# Altium PCB FxxZx.PcbDoc (part 2 of 2)
Units mil, origin at the board's own origin, x right, y up, seen from the top; angles counter-clockwise.
Board outline 1968 x 1968 mil, 4 copper layers (Top Layer, Gnd Layer, Vcc Layer, Bottom Layer), stack 30.635 mil thick; 55 components, 130 nets, 443 pads, 464 vias.
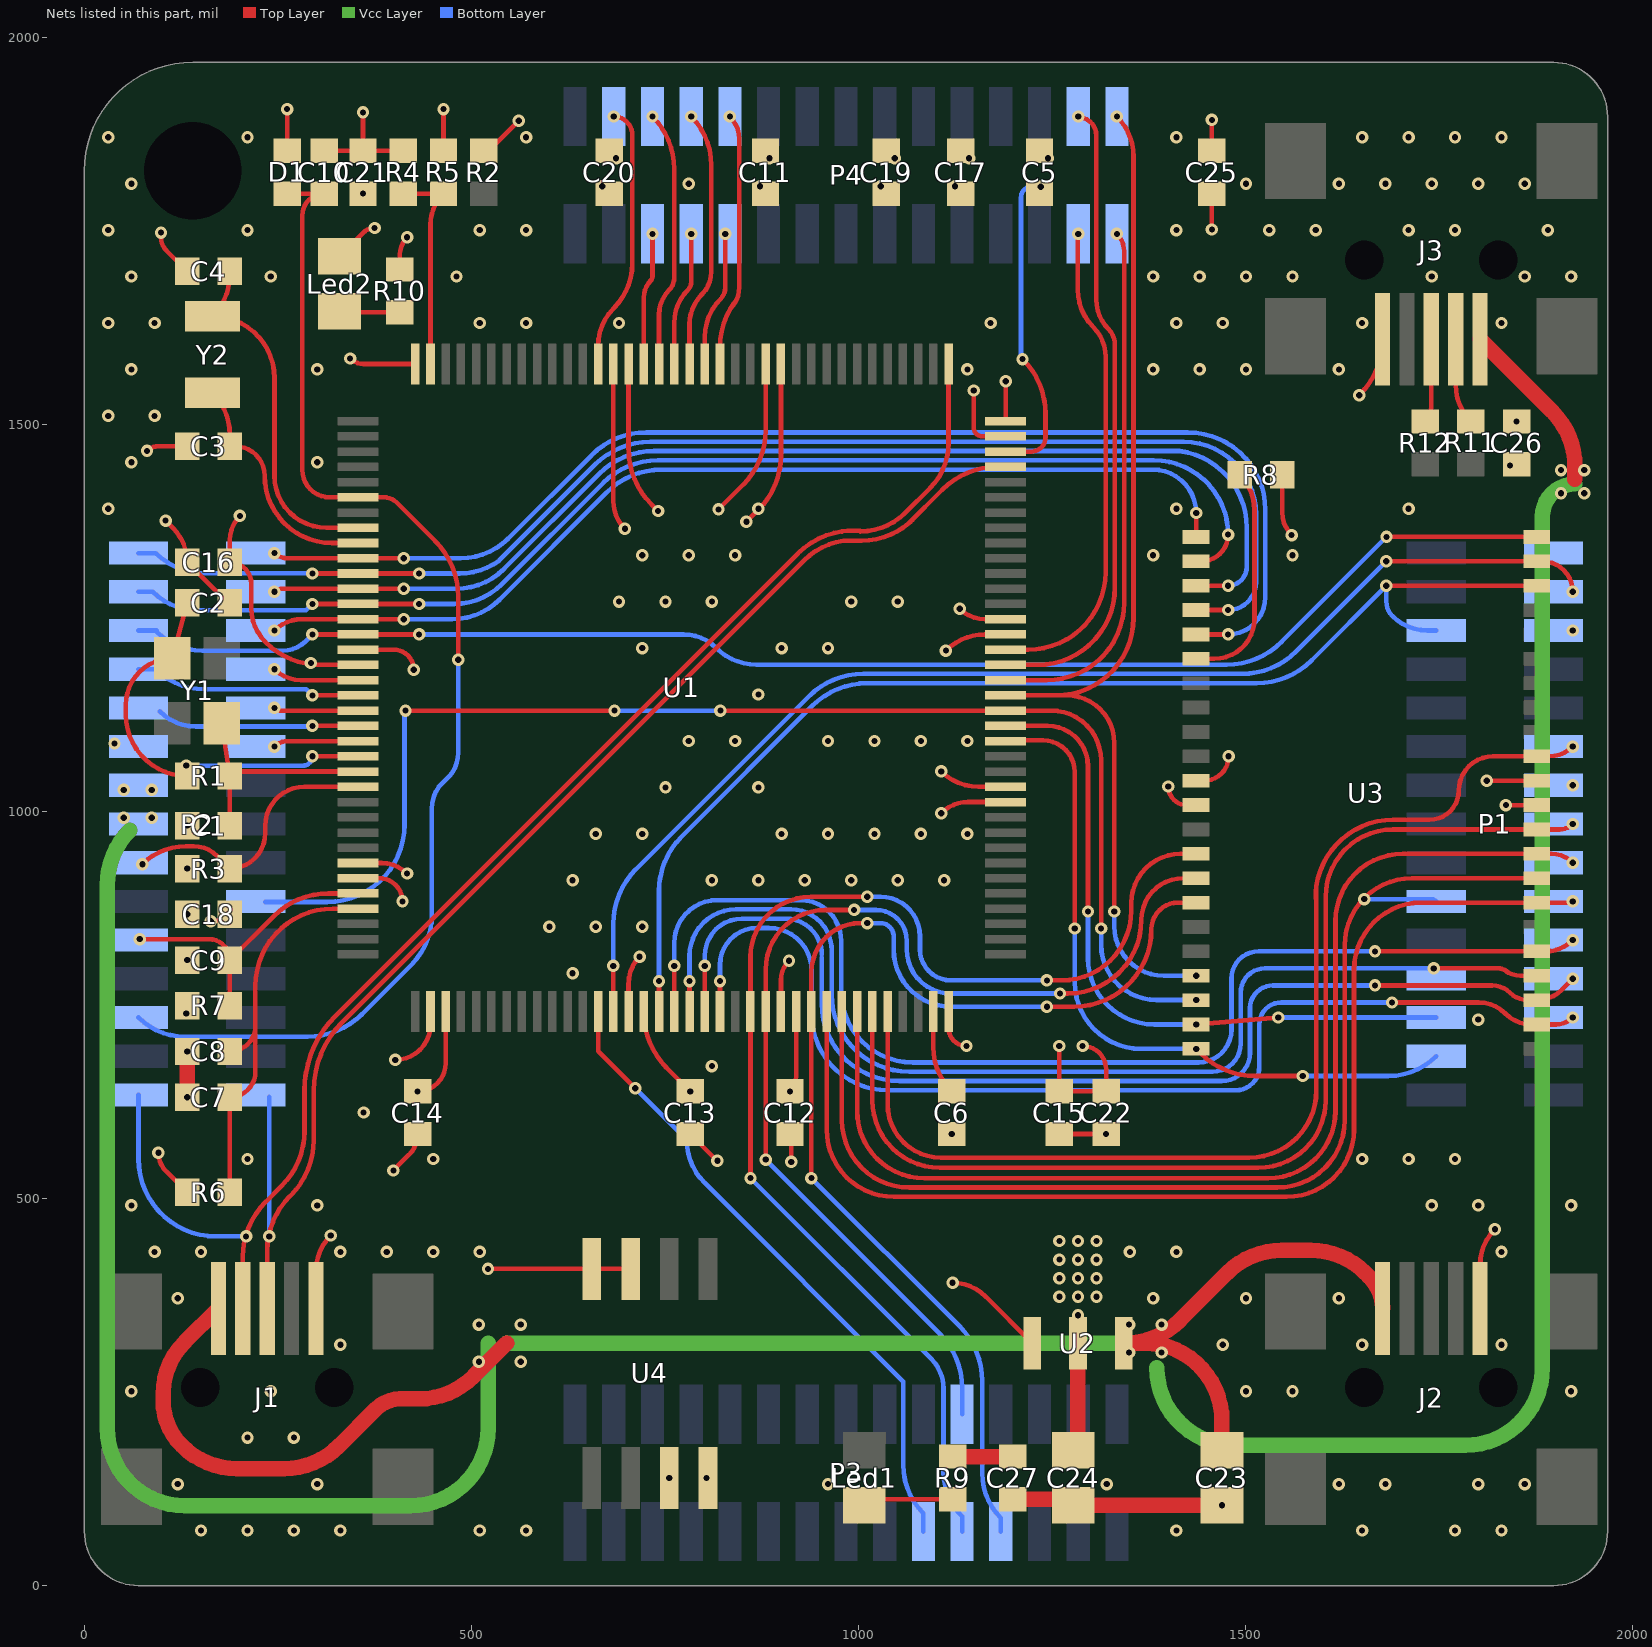
[diagram p4: the nets of this part, all layers, seen from the top]

## Via types
v1: diameter 16, hole 8, Top Layer to Bottom Layer, 464 vias

## Nets (pads, with @x,y where several pads share a name; then routed paths per layer and width w, separated by ;. In a path a pad name is that pad's centre, name@x,y a point inside that pad or via, vN(x,y) a via of type N, cw(c..) or ccw(c..) an arc to the next point about the centre after c; other vN are vias at no path point) (continued)
E8: P3.5 U1.59 U3.14 | length 1640.4
  Top Layer w6: v1(860.58,526.49) U1.59@860.58,741.69 860.58,811.97 cw(c938.58,811.97) 938.58,889.97 v1(1011.52,889.97) ; v1(1243.52,781.97) 1262.58,781.97 ccw(c1262.58,871.97) 1352.58,871.97 1352.58,881.97 cw(c1416.04,881.97) 1416.04,945.43 U3.14@1436.37,945.43 U3.14@1433.37,942.43
  Bottom Layer w6: v1(860.58,526.49) 1094.05,293.02 cw(c1055.44,254.42) 1110.04,254.42 1110.04,147.26 ccw(c1191.85,147.26) 1134,89.42 P3.5@1134,70 ; v1(1011.52,889.97) 1028.52,889.97 cw(c1028.52,838.97) 1079.52,838.97 1079.52,821.97 ccw(c1119.52,821.97) 1119.52,781.97 v1(1243.52,781.97)
E9: P3.26 U1.60 U3.15 | length 1426.6
  Top Layer w6: v1(880.27,550.49) U1.60@880.27,741.69 880.27,795.69 cw(c957.55,795.69) 957.55,872.97 v1(994.52,872.97) ; v1(1260.52,764.97) 1270.57,764.97 ccw(c1270.57,859.97) 1365.57,859.97 cw(c1419.54,859.97) 1405.11,911.97 cw(c1419.54,859.97) 1419.54,913.94 U3.15@1436.37,913.94
  Bottom Layer w6: v1(880.27,550.49) 1104.71,326.05 cw(c1034,255.33) 1134,255.33 P3.26@1134,221.57 ; v1(994.52,872.97) 1022.74,872.97 cw(c1022.74,833.2) 1062.52,833.2 1062.52,821.97 ccw(c1119.52,821.97) 1119.52,764.97 v1(1260.52,764.97)
E10: P3.4 U1.63 U3.16 | length 1495.1
  Top Layer w6: v1(939.32,526.49) U1.63@939.32,741.69 939.32,792.71 cw(c1002.58,792.71) 1002.58,855.97 v1(1011.52,855.97) ; v1(1243.52,747.97) 1278.56,747.97 ccw(c1278.56,847.97) 1378.56,847.97 cw(c1413.03,847.97) 1413.03,882.44 U3.16@1436.37,882.44
  Bottom Layer w6: v1(939.32,526.49) 1130.75,335.06 cw(c1060.04,264.35) 1160.04,264.35 1160.04,145.26 ccw(c1241.85,145.26) 1184,87.42 P3.4@1184,70 ; v1(1011.52,855.97) 1028.52,855.97 cw(c1028.52,838.97) 1045.52,838.97 1045.52,821.97 ccw(c1119.52,821.97) 1119.52,747.97 v1(1243.52,747.97)
E11: P1.10 U1.64 U3.29 | length 1471.8
  Top Layer w6: U1.64@959.01,741.69 959.01,589.36 ccw(c1046.01,589.36) 1046.01,502.36 1553.31,502.36 ccw(c1553.31,589.36) 1640.31,589.36 1640.31,795.44 cw(c1727.31,795.44) 1727.31,882.44 U3.29@1876.37,882.44 1919.24,882.44 ccw(c1919.24,887.76) v1(1923,884)
E12: P1.21 U1.65 U3.30 | length 1506.1
  Top Layer w6: U1.65@978.69,741.69 978.69,601.36 ccw(c1065.69,601.36) 1065.69,514.36 1541.31,514.36 ccw(c1541.31,601.36) 1628.31,601.36 1628.31,826.94 cw(c1715.31,826.94) 1715.31,913.94 U3.30@1876.37,913.94
  Bottom Layer w6: v1(1653.65,886.91) 1739.39,886.91 cw(c1739.39,876.97) P1.21@1746.43,884
E13: P1.9 U1.66 U3.31 | length 1450.1
  Top Layer w6: U1.66@998.38,741.69 998.38,613.36 ccw(c1085.38,613.36) 1085.38,526.36 1529.31,526.36 ccw(c1529.31,613.36) 1616.31,613.36 1616.31,858.43 cw(c1703.31,858.43) 1703.31,945.43 U3.31@1876.37,945.43 1895.4,945.43 cw(c1895.4,906.4) v1(1923,934)
E14: P1.8 U1.67 U3.32 | length 1433.6
  Top Layer w6: U1.67@1018.06,741.69 1018.06,626.92 ccw(c1105.06,626.92) 1105.06,539.92 1516.69,539.92 ccw(c1516.69,626.92) 1603.69,626.92 1603.69,889.93 cw(c1690.69,889.93) 1690.69,976.93 U3.32@1876.37,976.93 1905.93,976.93 ccw(c1905.93,1001.07) v1(1923,984)
E15: P1.6 U1.68 U3.35 | length 1467.8
  Top Layer w6: U1.68@1037.75,741.69 1037.75,621.95 ccw(c1106.79,621.95) 1106.79,552.91 1504.69,552.91 ccw(c1504.69,639.91) 1591.69,639.91 1591.69,903.48 ; 1590.7,887.45 1590.7,889.45 cw(c1690.7,889.45) 1591.69,903.48 ; v1(1923,1084) cw(c1892.62,1114.38) 1892.62,1071.42 U3.35@1876.37,1071.42 1819.86,1071.42 ccw(c1819.86,1027.25) 1775.69,1027.25 cw(c1737.89,1027.25) 1737.89,989.45 1690.7,989.45 ccw(c1690.7,889.45) 1591.69,903.48
F0: P2.1 U1.10 U3.5 | length 1627.9
  Top Layer w6: v1(245.6,1334) ccw(c261.72,1350.12) 261.72,1327.32 U1.10@353.69,1327.32 v1(412.75,1327.32) ; U3.5@1436.37,1228.9 v1(1477.69,1228.9)
  Bottom Layer w6: v1(412.75,1327.32) 485.99,1327.32 ccw(c485.99,1414.32) 547.51,1352.8 655.26,1460.55 cw(c725.97,1389.84) 725.97,1489.84 1425.69,1489.84 cw(c1425.69,1389.84) 1525.69,1389.84 1525.69,1276.9 cw(c1477.69,1276.9) v1(1477.69,1228.9)
F1: P2.30 U1.11 U3.4 | length 1752.7
  Top Layer w6: v1(294.64,1307.64) U1.11@353.69,1307.64 v1(432.43,1307.64) ; U3.4@1436.37,1260.39 v1(1477.69,1260.39)
  Bottom Layer w6: P2.30@70.03,1334 92.31,1334 ccw(c155.17,1396.86) 155.17,1307.96 294.31,1307.96 v1(294.64,1307.64) ; v1(432.43,1307.64) 484.68,1307.64 ccw(c484.68,1394.64) 536.25,1324.57 660.23,1448.55 cw(c730.94,1377.84) 730.94,1477.84 1420,1477.84 cw(c1420,1384.15) 1513.69,1384.15 1513.69,1296.39 cw(c1477.69,1296.39) v1(1477.69,1260.39)
F2: P2.2 U1.12 U3.3 | length 1509.1
  Top Layer w6: v1(245.6,1284) cw(c255.14,1274.46) 255.14,1287.95 U1.12@353.69,1287.95 v1(412.75,1287.95) ; U3.3@1436.37,1291.89 v1(1477.69,1291.89)
  Bottom Layer w6: v1(412.75,1287.95) 480.57,1287.95 ccw(c480.57,1374.95) 542.08,1313.43 665.2,1436.55 cw(c735.91,1365.84) 735.91,1465.84 1414.69,1465.84 ; 1415.31,1465.84 cw(c1401.69,1366.77) 1501.69,1366.77 1501.69,1315.89 cw(c1477.69,1315.89) v1(1477.69,1291.89)
F3: P2.29 U1.13 U3.2 | length 1602.1
  Top Layer w6: v1(294.64,1268.27) U1.13@353.69,1268.27 v1(432.43,1268.27) ; U3.2@1436.37,1323.39 1443.24,1323.39 ccw(c1443.24,1357.84) v1(1477.69,1357.84)
  Bottom Layer w6: P2.29@70.03,1284 88.31,1284 ccw(c146.15,1341.85) 146.15,1260.04 286.41,1260.04 v1(294.64,1268.27) ; v1(432.43,1268.27) 477.85,1268.27 ccw(c477.85,1355.27) 539.37,1293.75 670.17,1424.55 cw(c740.88,1353.84) 740.88,1453.84 1381.69,1453.84 cw(c1381.69,1357.84) v1(1477.69,1357.84)
F4: P2.3 U1.14 U3.1 | length 1329.6
  Top Layer w6: v1(245.6,1234) cw(c280.81,1198.79) 280.81,1248.58 U1.14@353.69,1248.58 v1(412.75,1248.58) ; U3.1@1436.37,1354.88 v1(1436.37,1385.84)
  Bottom Layer w6: v1(412.75,1248.58) 475.14,1248.58 ccw(c475.14,1335.58) 536.65,1274.06 675.14,1412.55 cw(c745.85,1341.84) 745.85,1441.84 1380.37,1441.84 cw(c1380.37,1385.84) v1(1436.37,1385.84)
F5: P2.28 U1.15 U3.44 | length 1894.2
  Top Layer w6: v1(294.64,1228.9) U1.15@353.69,1228.9 v1(432.43,1228.9) ; v1(1682.31,1354.88) U3.44@1876.37,1354.88
  Bottom Layer w6: P2.28@70.03,1234 P2.28@93.31,1234 ; P2.28@93.31,1232.42 ccw(c152.35,1291.46) 152.35,1207.96 256.31,1207.96 ccw(c256.31,1249.95) 285.99,1220.25 v1(294.64,1228.9) ; v1(432.43,1228.9) 774.11,1228.9 cw(c774.11,1169.22) 816.31,1211.42 ccw(c868.24,1263.35) 868.24,1189.91 1475.91,1189.91 ccw(c1475.91,1289.91) 1546.62,1219.19 v1(1682.31,1354.88)
F6: P2.4 U1.18 | length 111.9
  Top Layer w6: v1(245.6,1184) ccw(c279.78,1218.18) 279.78,1169.84 U1.18@353.69,1169.84
F7: P2.27 U1.19 | length 293.9
  Top Layer w6: v1(294.64,1150.16) U1.19@353.69,1150.16
  Bottom Layer w6: P2.27@70.03,1184 92.31,1184 ccw(c155.17,1246.86) 155.17,1157.96 286.83,1157.96 v1(294.64,1150.16)
F8: P2.5 U1.20 | length 109
  Top Layer w6: v1(245.6,1134) ccw(c254.12,1142.52) 254.12,1130.47 U1.20@353.69,1130.47
F9: P2.26 U1.21 | length 261.9
  Top Layer w6: v1(294.64,1110.79) U1.21@353.69,1110.79
  Bottom Layer w6: P2.26@97.31,1129.42 ccw(c144.09,1176.2) 144.09,1110.04 293.89,1110.04 v1(294.64,1110.79)
F10: P2.6 U1.22 | length 110
  Top Layer w6: v1(245.6,1084) cw(c262.75,1066.85) 262.75,1091.1 U1.22@353.69,1091.1
F11: P3.6 U1.49 | length 838.6
  Top Layer w6: U1.49@663.73,741.69 663.73,690.69 v1(711.82,642.61)
  Bottom Layer w6: v1(711.82,642.61) 778.48,575.94 778.48,575.45 ccw(c856.41,575.45) 801.31,520.34 1057.96,263.69 1057.96,156.28 ccw(c1146.86,156.28) 1084,93.42 P3.6@1084,70
F12: P1.2 U1.50 U3.43 | length 1580.8
  Top Layer w6: U1.50@683.42,741.69 v1(683.42,800.75) ; v1(1682.05,1323.39) U3.43@1876.37,1323.39 1883.61,1323.39 cw(c1883.61,1284) v1(1923,1284)
  Bottom Layer w6: v1(683.42,800.75) 683.42,855.04 cw(c783.42,855.04) 712.71,925.75 935.57,1148.62 cw(c1006.29,1077.91) 1006.29,1177.91 1495.15,1177.91 ccw(c1495.15,1277.91) 1565.86,1207.19 v1(1682.05,1323.39)
F13: P1.28 U1.53 U3.42 | length 1567
  Top Layer w6: U1.53@742.47,741.69 v1(742.47,781.06) ; v1(1682.05,1291.89) U3.42@1876.37,1291.89
  Bottom Layer w6: v1(742.47,781.06) 742.47,897.12 cw(c842.47,897.12) 771.76,967.83 940.55,1136.62 cw(c1011.26,1065.91) 1011.26,1165.91 1514.64,1165.91 ccw(c1514.64,1265.91) 1585.35,1195.19 v1(1682.05,1291.89) 1682.05,1271.26 ccw(c1707.99,1271.26) 1689.65,1252.91 ccw(c1735.31,1298.57) 1735.31,1234 P1.28@1746.43,1234
F14: P1.11 U1.54 U3.27 | length 1542.6
  Top Layer w6: U1.54@762.16,741.69 v1(762.16,800.75) ; v1(1667.37,819.45) U3.27@1876.37,819.45 1887.87,819.45 ccw(c1887.87,869.13) v1(1923,834)
  Bottom Layer w6: v1(762.16,800.75) 762.16,830.21 cw(c817.64,830.21) 817.64,885.69 925.1,885.69 cw(c925.1,833.14) 976.41,844.5 cw(c925.1,833.14) 977.65,833.14 977.65,768.42 ccw(c1070.09,768.42) 1070.09,675.97 1439.54,675.97 ccw(c1439.54,718.43) 1482,718.43 1482,784.43 cw(c1517.02,784.43) 1517.02,819.45 v1(1667.37,819.45)
F15: P1.19 U1.55 U3.26 | length 1458.7
  Top Layer w6: U1.55@781.84,741.69 v1(781.84,781.06) ; v1(1743.37,797.45) 1826.34,797.45 cw(c1826.34,778.18) 1834.15,795.79 ; U3.26@1876.37,787.95 1855.3,787.95 cw(c1855.3,820.38) 1839.97,791.8 ; 1834.15,795.79 cw(c1826.34,778.18) 1839.97,791.8 ; 1834.15,795.79 ccw(c1855.3,820.38) 1839.97,791.8
  Bottom Layer w6: v1(781.84,781.06) 781.84,813.69 cw(c841.84,813.69) 841.84,873.69 912.94,873.69 cw(c912.94,821.14) 964.44,831.6 cw(c912.94,821.14) 965.49,821.14 965.49,763.97 ccw(c1065.49,763.97) 1065.49,663.97 1457.54,663.97 ccw(c1457.54,700.43) 1494,700.43 1494,766.43 cw(c1525.02,766.43) 1525.02,797.45 v1(1743.37,797.45)
G0: P1.12 U1.56 U3.25 | length 1474.3
  Top Layer w6: U1.56@801.53,741.69 v1(801.53,800.75) ; v1(1667.37,775.45) 1819.01,775.45 cw(c1819.01,743.19) 1841.79,766.02 ; 1841.83,765.99 ccw(c1864.86,789.04) 1864.86,756.46 U3.25@1876.37,756.46 ccw(c1876.37,802.54) 1908.95,769.95 v1(1923,784)
  Bottom Layer w6: v1(801.53,800.75) 801.53,813.69 cw(c849.53,813.69) 849.53,861.69 906.04,861.69 cw(c906.04,814.99) 952.4,820.6 cw(c906.04,814.99) 952.74,814.99 ; 952.74,811.96 952.74,751.97 ccw(c1052.74,751.97) 1052.74,651.97 1469.54,651.97 ccw(c1469.54,688.43) 1506,688.43 1506,746.08 cw(c1535.37,746.08) 1512.4,764.39 cw(c1535.37,746.08) 1535.37,775.45 v1(1667.37,775.45)
G1: P1.13 U1.57 U3.24 | length 1431.1
  Top Layer w6: U1.57@821.21,741.69 v1(821.21,781.06) ; v1(1689.37,753.45) 1801.23,753.45 cw(c1801.23,704.82) 1835.61,739.2 ccw(c1870,773.59) 1870,724.96 U3.24@1876.37,724.96 1901.18,724.96 ccw(c1901.18,755.82) v1(1923,734)
  Bottom Layer w6: v1(821.21,781.06) 821.21,801.69 cw(c869.21,801.69) 869.21,849.69 884.31,849.69 cw(c884.31,794.25) 939.75,794.25 939.75,738.42 ccw(c1038.2,738.42) 1038.2,639.97 1487.54,639.97 ccw(c1487.54,670.43) 1518,670.43 1518,725.08 cw(c1546.37,725.08) 1546.37,753.45 v1(1689.37,753.45)
G2: P1.17 U1.87 U3.22 | length 920.9
  Top Layer w6: U1.87@1193.58,1091.1 U1.87@1190.31,1091.1 cw(c1191.18,1091.1) 1191.18,1091.97 1238.58,1091.97 cw(c1238.58,1050.97) 1279.58,1050.97 v1(1279.58,848.97) ; v1(1436.37,693.46) U3.22@1442.11,687.72 ; U3.22@1442.11,687.72 ccw(c1512.82,758.43) 1512.82,658.43 v1(1574.05,658.43)
  Bottom Layer w6: v1(1279.58,848.97) 1279.58,779.46 ccw(c1365.58,779.46) 1365.58,693.46 v1(1436.37,693.46) ; v1(1574.05,658.43) 1684.7,658.43 ccw(c1684.7,745.72) P1.17@1746.43,684
G3: P1.18 U1.88 U3.21 | length 883.1
  Top Layer w6: U1.88@1190.31,1110.79 1244.58,1110.79 cw(c1244.58,1058.79) 1296.58,1058.79 v1(1296.58,870.97) ; v1(1436.37,724.96) v1(1542.43,734)
  Bottom Layer w6: v1(1296.58,870.97) 1296.58,810.96 ccw(c1382.58,810.96) 1382.58,724.96 v1(1436.37,724.96) ; v1(1542.43,734) P1.18@1746.43,734
G4: P2.10 U1.89 U3.20 | length 1722.3
  Top Layer w6: v1(414.91,1130.47) v1(684.91,1130.47) ; v1(821.69,1130.47) U1.89@1190.31,1130.47 1249.36,1130.47 cw(c1249.36,1066.25) 1313.58,1066.25 v1(1313.58,848.97) ; U3.20@1436.37,756.46 v1(1436.37,756.69)
  Bottom Layer w6: P2.10@233.69,883.25 313.69,883.25 ccw(c313.69,983.25) 413.69,983.25 413.69,1129.25 cw(c414.91,1129.25) v1(414.91,1130.47) ; v1(684.91,1130.47) v1(821.69,1130.47) ; v1(1313.58,848.97) 1313.58,827.97 ccw(c1384.86,827.97) 1384.86,756.69 v1(1436.37,756.69)
G5: P4.30 U1.90 U3.19 | length 1365
  Top Layer w6: U1.90@1190.31,1150.16 1255.38,1150.16 ; v1(1330.58,870.97) 1330.52,871.03 1330.52,1027.01 1330.58,1027.08 1330.58,1088.62 ccw(c1269.05,1088.62) 1269.05,1150.16 1255.38,1150.16 ; v1(1334,1897.97) cw(c1282.39,1846.36) 1355.38,1846.36 1355.38,1250.16 cw(c1255.38,1250.16) 1255.38,1150.16
  Bottom Layer w6: v1(1330.58,870.97) 1330.58,851.97 ccw(c1394.6,851.97) 1394.6,787.95 v1(1436.37,787.95)
G6: P4.1 U1.91 | length 689.2
  Top Layer w6: U1.91@1190.31,1169.84 1243.38,1169.84 ccw(c1243.38,1269.84) 1343.38,1269.84 1343.38,1723.76 ccw(c1311.36,1723.76) v1(1334,1746.4)
G7: P4.29 U1.92 | length 826.1
  Top Layer w6: U1.92@1190.31,1189.53 1231.38,1189.53 ccw(c1231.38,1289.53) 1331.38,1289.53 1331.38,1603.53 ccw(c1303.71,1603.53) 1323.31,1623.06 ; v1@1283.38,1897.36 cw(c1283.38,1873.36) 1307.38,1873.36 1307.38,1661.52 ccw(c1361.76,1661.52) 1323.27,1623.1
  other v1: 1284,1897.97
G8: P4.2 U1.93 | length 633.9
  Top Layer w6: U1.93@1190.31,1209.21 1219.38,1209.21 ccw(c1219.38,1309.21) 1319.38,1309.21 1319.38,1587.42 ccw(c1264.8,1587.42) 1303.39,1626.01 cw(c1351.72,1674.33) 1283.38,1674.33 v1@1283.38,1747.36
  other v1: 1284,1746.4
G9: P4.20 U1.124 | length 342.6
  Top Layer w6: U1.124@821.21,1578.31 821.21,1599.77 cw(c921.21,1599.77) 834.73,1649.98 ; v1(834,1897.97) cw(c805.03,1869) 846,1869 846,1677.18 cw(c807.53,1677.18) 842.81,1661.84 ; 834.73,1649.98 ccw(c807.53,1677.18) 842.81,1661.84 ; 834.73,1649.98 cw(c921.21,1599.77) 842.81,1661.84
G10: P4.11 U1.125 | length 175.2
  Top Layer w6: U1.125@801.53,1578.31 801.53,1612.98 cw(c871.42,1612.98) 822,1662.4 ccw(c807.51,1676.89) 828,1676.89 v1(828,1746.4)
G11: P4.19 U1.126 | length 334.1
  Top Layer w6: U1.126@781.84,1578.31 781.84,1629.39 cw(c837.01,1629.39) 798,1668.4 ccw(c769.03,1697.37) 810,1697.37 810,1835.21 ccw(c721.23,1835.21) v1(784,1897.97)
G12: P4.12 U1.127 | length 173.9
  Top Layer w6: U1.127@762.16,1578.31 762.16,1631.32 cw(c823.08,1631.32) 780,1674.4 ccw(c770.34,1684.06) 784,1684.06 v1(784,1746.4)
G13: P4.18 U1.128 | length 332.4
  Top Layer w6: v1(734,1897.97) cw(c666.4,1830.38) 762,1830.38 762,1688.89 cw(c741.51,1688.89) 756,1674.4 ccw(c788.66,1641.74) 742.47,1641.74 U1.128@742.47,1578.31
G14: P4.13 U1.129 | length 171.1
  Top Layer w6: U1.129@722.79,1578.31 722.79,1664.16 cw(c754.24,1664.16) 732,1686.4 ccw(c727.17,1691.23) 734,1691.23 v1(734,1746.4)
G15: P4.17 U1.132 | length 345.2
  Top Layer w6: U1.132@663.73,1578.31 663.73,1601.47 cw(c732.93,1601.47) 684,1650.4 ccw(c626.06,1708.34) 708,1708.34 708,1873.97 ccw(c684,1873.97) v1(684,1897.97)
GND: C1.1 C2.1 C3.1 C4.1 C5.1 C6.1 C7.1 C8.1 C9.1 C10.1 C11.1 C12.1 C13.1 C14.1 C15.1 C16.1 C17.1 C18.1 C19.1 C20.1 C21.1 C22.1 C23.1 C24.1 C25.1 C26.1 C27.1 J1.5 J2.5 J3.5 Led2.2 P1.3 P2.25 R2.1 R4.1 U1.16 U1.31 U1.38 U1.51 U1.61 U1.83 U1.94 U1.107 U1.120 U1.130 U2.1 U3.12 U3.34 U4.4 | length 2715.4
  Top Layer w6: v1(81,1466) cw(c95.49,1451.51) 95.49,1472 C3.1@132.88,1472 ; v1(99,1748) 99,1742 ccw(c123.43,1742) 106.15,1724.73 C4.1@132.88,1698 ; v1(105,1376) 114.41,1366.59 cw(c69.83,1322) C16.1@132.88,1322 182.68,1272.2 ccw(c188,1277.53) C2.1@188,1270 ; J1.5@299.21,358.27 299.21,406.31 cw(c364.41,406.31) v1(318.31,452.42) ; C10.1@310,1853.56 C21.1@360,1853.56 ; Led2.2@329.69,1717.25 360.39,1747.95 cw(c375,1733.34) v1(375,1754) ; U1.31@353.69,913.94 381.06,913.94 cw(c381.06,884) v1(411,884) ; U1.16@353.69,1209.21 399.73,1209.21 cw(c399.73,1183.25) v1(425.69,1183.25) ; v1(360,1903.26) C21.1@360,1853.56 ; v1(399.31,536.42) 419.32,556.43 ccw(c392.26,583.49) C14.1@430.53,583.49 ; v1(401.69,679.25) ccw(c401.69,724.76) 447.2,724.76 U1.38@447.2,741.69 ; R4.1@412,1853.56 C21.1@360,1853.56 ; R2.1@516,1853.56 ccw(c516,1869.13) 527.01,1858.12 v1(561.31,1892.42) ; U1.51@703.1,741.69 703.1,778.12 cw(c751.6,778.12) v1(717.31,812.42) ; U1.130@703.1,1578.31 703.1,1468.04 ccw(c803.1,1468.04) 732.39,1397.33 v1(741.31,1388.42) ; C13.1@782.73,583.49 v1@817.55,548.66 ; v1(855.31,1374.42) 870.66,1389.77 ccw(c799.95,1460.48) 899.95,1460.48 U1.120@899.95,1578.31 ; U1.61@899.95,741.69 899.95,782.42 cw(c935.3,782.42) v1(910.31,807.42) ; C12.1@911.69,583.49 cw(c907.8,579.59) 913.31,579.59 v1(913.31,547.42) ; v1(1107,998) cw(c1141.67,963.33) 1141.67,1012.36 U1.83@1190.31,1012.36 ; v1(1113,1208) cw(c1163.45,1157.55) 1163.45,1228.9 U1.94@1190.31,1228.9 ; v1(1121.69,391.25) cw(c1121.69,331.03) 1164.28,373.61 U2.1@1224.64,313.25 ; v1(1149,1544) 1149,1496 ccw(c1160.2,1496) 1160.2,1484.8 U1.107@1190.31,1484.8 ; C15.1@1259.52,583.49 v1(1320,583.49) ; v1(1400.31,1032.42) ccw(c1424.3,1032.42) 1424.3,1008.43 U3.12@1436.37,1008.43 ; C25.1@1456.69,1853.56 v1(1456.69,1893.6) ; v1(1647,1538) 1647.88,1538.88 ccw(c1577.17,1609.59) 1677.17,1609.59 J3.5@1677.17,1610.23 ; J2.5@1803.15,358.27 1803.15,414.16 cw(c1868.56,414.16) v1(1822.31,460.42) ; v1(1811.69,1039.92) U3.34@1876.37,1039.92
  Top Layer w20: v1(132.88,631.07) v1(132.88,690.13) ; C27.1@1199.69,111.69 1258.68,111.69 cw(c1258.68,84.81) C24.1@1277.69,103.82 v1(1469.69,103.82)
  other v1: 150.79,71.26 210.79,71.26 270.79,71.26 330.79,71.26 510.79,71.26 570.79,71.26 1410.79,71.26 1650.79,71.26 1770.79,71.26 1830.79,71.26 120.79,131.26 300.79,131.26 960.79,131.26 1320.79,131.26 1620.79,131.26 1680.79,131.26 1800.79,131.26 1860.79,131.26 803.69,139.25 210.79,191.26 270.79,191.26 60.79,251.26 240.79,251.26 1500.79,251.26 1560.79,251.26 1920.79,251.26 330.79,311.26 1470.79,311.26 1650.79,311.26 1830.79,311.26 120.79,371.26 1380.79,371.26 1500.79,371.26 1620.79,371.26 90.79,431.26 150.79,431.26 330.79,431.26 390.79,431.26 450.79,431.26 510.79,431.26 1350.79,431.26 1410.79,431.26 1830.79,431.26 60.79,491.26 300.79,491.26 1740.79,491.26 1800.79,491.26 1920.79,491.26 817.89,549.03 210.79,551.26 450.79,551.26 1650.79,551.26 1710.79,551.26 1770.79,551.26 1120.52,583.49 360.79,611.26 810.79,671.26 1800.79,731.26 630.79,791.26 132.88,808.24 600.79,851.26 660.79,851.26 720.79,851.26 132.88,867.29 630.79,911.26 810.79,911.26 870.79,911.26 930.79,911.26 990.79,911.26 1050.79,911.26 1110.79,911.26 660.79,971.26 720.79,971.26 900.79,971.26 960.79,971.26 1020.79,971.26 1080.79,971.26 1140.79,971.26 132.88,982 750.79,1031.26 870.79,1031.26 39,1088 780.79,1091.26 840.79,1091.26 960.79,1091.26 1020.79,1091.26 1080.79,1091.26 1140.79,1091.26 870.79,1151.26 720.79,1211.26 900.79,1211.26 960.79,1211.26 1923,1234 690.79,1271.26 750.79,1271.26 810.79,1271.26 990.79,1271.26 1050.79,1271.26 720.79,1331.26 780.79,1331.26 840.79,1331.26 1380.79,1331.26 1560.79,1331.26 30.79,1391.26 870.79,1391.26 1410.79,1391.26 1710.79,1391.26 60.79,1451.26 300.79,1451.26 1850.39,1503.94 30.79,1511.26 90.79,1511.26 60.79,1571.26 300.79,1571.26 1140.79,1571.26 1380.79,1571.26 1440.79,1571.26 1500.79,1571.26 1620.79,1571.26 30.79,1631.26 90.79,1631.26 510.79,1631.26 570.79,1631.26 690.79,1631.26 1170.79,1631.26 1410.79,1631.26 1470.79,1631.26 1650.79,1631.26 1830.79,1631.26 60.79,1691.26 240.79,1691.26 480.79,1691.26 1380.79,1691.26 1440.79,1691.26 1500.79,1691.26 1560.79,1691.26 1740.79,1691.26 1860.79,1691.26 1920.79,1691.26 30.79,1751.26 210.79,1751.26 510.79,1751.26 570.79,1751.26 1410.79,1751.26 1530.79,1751.26 1590.79,1751.26 1710.79,1751.26 1770.79,1751.26 1890.79,1751.26 60.79,1811.26 780.79,1811.26 1500.79,1811.26 1620.79,1811.26 1680.79,1811.26 1740.79,1811.26 1800.79,1811.26 1860.79,1811.26 687,1844 885,1844 1047,1844 1143,1844 1245,1844 30.79,1871.26 210.79,1871.26 570.79,1871.26 1410.79,1871.26 1650.79,1871.26 1710.79,1871.26 1770.79,1871.26 1830.79,1871.26
NetC1_2: C1.2 R1.1 U1.24 Y1.1 | length 300
  Top Layer w6: Y1.1@177.65,1114 R1.1@188,1046 ; C1.2@188,982 R1.1@188,1046 ; U1.24@353.69,1051.73 201.84,1051.73 ccw(c201.84,1032.16) R1.1@188,1046
NetC2_2: C2.2 R1.2 U1.23 Y1.3 | length 534.8
  Top Layer w6: R1.2@132.88,1046 cw(c132.88,1125.19) 53.69,1125.19 53.69,1138.04 cw(c113.65,1138.04) Y1.3@113.65,1198 C2.2@132.88,1270 ; v1(294.64,1071.42) U1.23@353.69,1071.42
  Bottom Layer w6: v1(131.69,1059.42) 282.64,1059.42 ccw(c282.64,1071.42) v1(294.64,1071.42)
NetC3_2: C3.2 U1.9 Y2.1 | length 312
  Top Layer w6: Y2.1@165.65,1541 cw(c111.7,1487.05) 188,1487.05 C3.2@188,1472 194.92,1472 cw(c194.92,1434) 232.92,1434 ccw(c319.91,1434) 319.91,1347.01 U1.9@353.69,1347.01
NetC4_2: C4.2 U1.8 Y2.2 | length 462.1
  Top Layer w6: C4.2@188,1698 188,1693.95 cw(c111.7,1693.95) Y2.2@165.65,1640 cw(c165.65,1560.05) 245.6,1560.05 245.6,1434 ccw(c312.91,1434) 312.91,1366.69 U1.8@353.69,1366.69
NetC5_2: C5.2 U1.106 | length 413.8
  Top Layer w6: U1.106@1190.31,1465.12 1223.56,1465.12 ccw(c1223.56,1483.25) 1241.69,1483.25 1241.69,1513.83 ccw(c1141.69,1513.83) v1@1212.4,1584.54
  Bottom Layer w6: v1(1212.09,1584.65) cw(c1217.04,1589.6) 1210.04,1589.6 1210.04,1793.6 cw(c1223.69,1793.6) 1223.69,1807.25 v1(1235.69,1807.25)
NetC6_2: C6.2 U1.71 | length 120.8
  Top Layer w6: U1.71@1096.8,741.69 1096.8,695.86 ccw(c1177.78,695.86) C6.2@1120.52,638.61 ; C6.2@1126.09,646.65 C6.2@1134.13,638.61
NetC7_2: C7.2 C8.2 R6.2 U1.33 | length 527
  Top Layer w6: R6.2@188,508 C7.2@188,631.07 ccw(c188,664.06) 220.99,664.06 220.99,723.12 ; C8.2@188,690.13 ccw(c188,723.12) 220.99,723.12 ; U1.33@353.69,874.57 320.99,874.57 ccw(c320.99,774.57) 220.99,774.57 220.99,723.12
NetJ3_2: J3.2 R11.1 | length 111.6
  Top Layer w6: J3.2@1771.66,1610.23 1771.66,1551.45 ccw(c1838.85,1551.45) R11.1@1791.34,1503.94
NetJ3_3: J3.3 R12.1 | length 108.4
  Top Layer w6: R12.1@1732.28,1503.94 ccw(c1713.27,1522.96) 1740.16,1522.96 J3.3@1740.16,1610.23
NetLed1_1: Led1.1 R9.1 | length 118.5
  Top Layer w6: Led1.1@1007.69,103.82 cw(c1015.57,103.82) 1015.57,111.69 R9.1@1121.69,111.69
NetLed2_1: Led2.1 R10.1 | length 78.6
  Top Layer w6: Led2.1@329.69,1646.39 ccw(c330.83,1646.39) 330.83,1645.25 R10.1@407.69,1645.25
NetR4_2: R4.2 R5.2 U1.143 | length 276.6
  Top Layer w6: R4.2@412,1798.44 R5.2@464,1798.44 ccw(c504.57,1757.87) 447.2,1757.87 U1.143@447.2,1578.31
NetR8_1: R8.1 U3.6 | length 296
  Top Layer w6: U3.6@1436.37,1197.4 1459.84,1197.4 ccw(c1459.84,1249.25) 1488.8,1206.24 ccw(c1459.84,1249.25) 1511.69,1249.25 1511.69,1389.1 ccw(c1446.42,1389.1) R8.1@1492.57,1435.25
Rst: P2.22 R3.2 U1.25 | length 359.4
  Top Layer w6: v1(75,932) cw(c131.21,875.79) 131.21,955.28 141,955.28 cw(c141,911.68) 171.84,942.51 R3.2@188,926.35 ccw(c188,972.04) 233.69,972.04 233.69,981.42 cw(c284.32,981.42) 284.32,1032.05 U1.25@353.69,1032.05
SWCLK: J1.2 P2.16 U1.109 | length 1901.6
  Top Layer w6: J1.2@204.72,358.27 204.72,424.9 cw(c304.72,424.9) 234.01,495.61 255.09,516.68 ccw(c184.38,587.39) 284.38,587.39 284.38,639.64 cw(c420.38,639.64) 324.21,735.81 922.08,1333.67 cw(c992.79,1262.96) 978.76,1361.97 cw(c992.79,1262.96) 992.79,1362.96 1002.58,1362.96 ; 1002.58,1361.97 ccw(c1002.58,1443.91) 1060.49,1385.94 ; 1060.52,1385.97 1092.49,1417.94 ccw(c1034.55,1475.88) 1116.49,1475.88 U1.109@1116.49,1578.31
  Bottom Layer w6: P2.16@70.03,634 70.03,551.25 ccw(c170.03,551.25) 170.03,451.25 v1(208.99,451.25)
SWDIO: J1.3 P2.15 U1.105 | length 1725.4
  Top Layer w6: J1.3@236.22,358.27 236.22,432.39 cw(c336.22,432.39) 265.51,503.1 267.09,504.68 ccw(c196.38,575.39) 296.38,575.39 296.38,639.64 cw(c420.38,639.64) 332.7,727.32 929.86,1324.48 cw(c993.73,1260.61) 980.55,1349.97 1004.29,1349.97 ccw(c1004.29,1443.15) 1065.07,1372.52 ; 1070.18,1377.26 cw(c1004.29,1443.15) 1065.07,1372.52 ; U1.105@1190.31,1445.43 1179.4,1445.43 ccw(c1179.4,1345.43) 1108.69,1416.14 1065.07,1372.52
  Bottom Layer w6: v1(238.99,451.25) P2.15@238.99,631.25
Vbat: C10.2 D1.2 P2.18 U1.6 | length 1601.8
  Top Layer w6: D1.2@262,1798.44 C10.2@310,1798.44 ccw(c310,1770.13) 281.69,1770.13 281.69,1441.25 ccw(c316.88,1441.25) 316.88,1406.06 U1.6@353.69,1406.06 387.31,1406.06 cw(c387.31,1383.48) 403.28,1399.45 453.7,1349.02 cw(c382.99,1278.31) 482.99,1278.31 v1(482.99,1196.25)
  Bottom Layer w6: P2.18@70.03,734 ccw(c129.77,793.75) 129.77,709.25 288.27,709.25 ccw(c288.27,809.25) 358.98,738.54 422.31,801.87 ccw(c357.9,866.28) 448.99,866.28 448.99,1003.59 cw(c498.99,1003.59) 458.1,1032.36 ; 458.17,1032.46 ccw(c498.99,1003.59) 458.1,1032.36 ; 472.45,1046.68 ccw(c437.06,1075.96) 472.59,1046.85 ; v1(482.99,1196.25) 482.99,1075.96 cw(c437.06,1075.96) 472.59,1046.85 ; 458.1,1032.36 472.59,1046.85
VCC: C11.2 C12.2 C13.2 C14.2 C15.2 C16.2 C17.2 C18.2 C19.2 C20.2 C21.2 C22.2 C24.2 C25.2 C26.2 C27.2 D1.1 P1.7 R3.1 R5.1 R6.1 R7.2 R8.2 R9.2 R10.2 U1.17 U1.30 U1.39 U1.52 U1.62 U1.72 U1.84 U1.95 U1.108 U1.121 U1.131 U1.144 U2.2 U3.11 U3.33 U4.3 U4.7 U4.8 | length 2577.9
  Top Layer w6: v1(95.69,559.25) ccw(c129.64,559.25) 105.64,535.25 R6.1@132.88,508 ; v1(163.31,858.42) 166.58,858.42 ccw(c166.58,888.72) C18.2@188,867.29 ; v1(201,1382) ccw(c232.38,1350.62) 188,1350.62 C16.2@188,1322 cw(c188,1294.31) 215.69,1294.31 215.69,1263.32 ccw(c278.63,1263.32) 234.13,1218.82 ccw(c304.84,1289.53) 304.84,1189.53 U1.17@353.69,1189.53 ; D1.1@262,1853.56 v1(262,1907.59) ; v1(343.31,1585.42) ccw(c360.47,1602.58) 360.47,1578.31 U1.144@427.51,1578.31 ; U1.30@353.69,933.62 384.11,933.62 cw(c384.11,887.11) v1(417,920) ; R10.2@407.69,1700.37 407.69,1719.53 cw(c439.47,1719.53) v1(417,1742) ; v1(430.53,638.61) ccw(c430.53,674.96) 466.88,674.96 U1.39@466.88,741.69 ; R5.1@464,1853.56 v1(464,1907.59) ; v1(521.56,409.25) U4.8@655.69,409.25 U4.7@705.69,409.25 ; U1.131@683.42,1578.31 683.42,1401.36 ccw(c734.25,1401.36) v1(698.31,1365.42) ; U1.52@722.79,741.69 722.79,739.97 ccw(c822.79,739.97) 752.08,669.26 v1(782.73,638.61) ; v1(819.31,1390.42) 850.98,1422.09 ccw(c780.27,1492.8) 880.27,1492.8 U1.121@880.27,1578.31 ; v1(911.69,638.61) ccw(c892.51,657.79) 919.64,657.79 U1.62@919.64,741.69 ; v1(1107,1052) ccw(c1155.17,1100.17) 1155.17,1032.05 U1.84@1190.31,1032.05 ; U1.72@1116.49,741.69 1116.49,720.46 ccw(c1139.69,720.46) v1(1139.69,697.25) ; v1(1131,1262) ccw(c1163.39,1294.39) 1163.39,1248.58 U1.95@1190.31,1248.58 ; U1.108@1190.31,1504.49 v1(1190.31,1556) ; v1(1259.52,697.25) C15.2@1259.52,638.61 C22.2@1320,638.61 1320,666.95 ccw(c1289.69,666.95) v1(1289.69,697.25) ; U3.11@1436.37,1039.92 1446.81,1039.92 ccw(c1446.81,1071.42) v1(1478.31,1071.42) ; v1(1456.69,1752.09) C25.2@1456.69,1798.44 ; R8.2@1547.69,1435.25 1547.69,1386.22 ccw(c1588.66,1386.22) v1(1559.69,1357.25) ; v1(1836.52,1008.43) U3.33@1876.37,1008.43
  Top Layer w20: R9.2@1121.69,166.81 C27.2@1199.69,166.81 ; C24.2@1277.69,174.69 ccw(c1277.69,180.69) 1283.69,180.69 U2.2@1283.69,313.25
  other v1: 755.69,139.25 1283.69,349.25 1259.69,373.25 1283.69,373.25 1307.69,373.25 1259.69,397.25 1283.69,397.25 1307.69,397.25 1259.69,421.25 1283.69,421.25 1307.69,421.25 1259.69,445.25 1283.69,445.25 1307.69,445.25 131.69,739.25 132.88,926.35 1923,1034 292.75,1191.95 1841.69,1447.25 360,1798.44 669,1808 873,1808 1029,1808 1125,1808
Vin: C23.2 J1.1 J2.1 J3.1 P1.1 P2.23 P2.24 U2.3 | length 5658.7
  Top Layer w20: J1.1@173.23,358.27 129.61,314.65 ccw(c197.01,247.25) 101.69,247.25 101.69,239.19 ccw(c183.63,239.19) 125.69,181.25 126.4,180.54 ccw(c197.11,251.25) 197.11,151.25 258.27,151.25 ccw(c258.27,251.25) 328.98,180.54 376.97,228.52 cw(c407.69,197.8) 407.69,241.25 432.27,241.25 ccw(c432.27,341.25) 502.98,270.54 545.69,313.25 ; U2.3@1342.75,313.25 U2.3@1344.27,313.25 ; C23.2@1469.69,174.69 1469.69,213.25 ccw(c1369.69,213.25) 1369.69,313.25 U2.3@1344.27,313.25 ; J2.1@1677.17,358.27 ccw(c1620.41,358.27) 1660.54,398.4 1654.98,403.96 ccw(c1584.27,333.25) 1584.27,433.25 1547.11,433.25 ccw(c1547.11,333.25) 1476.4,403.96 1414.98,342.54 cw(c1344.27,413.25) U2.3@1344.27,313.25 ; J3.1@1803.15,1610.23 1896.4,1516.98 cw(c1825.69,1446.27) 1925.69,1446.27 1925.69,1429.25
  Vcc Layer w20: 58.98,975.98 ccw(c129.69,905.27) 29.69,905.27 29.69,203.25 ccw(c129.69,203.25) 129.69,103.25 421.69,103.25 ccw(c421.69,203.25) 521.69,203.25 521.69,313.25 ; 545.69,313.25 1373.69,313.25 ; 1385.69,281.25 ccw(c1485.69,281.25) 1485.69,181.25 1783.69,181.25 ccw(c1783.69,281.25) 1883.69,281.25 1883.69,1381.25 cw(c1925.69,1381.25) 1925.69,1423.25
  other v1: 509.69,289.25 563.69,289.25 1349.69,301.25 1391.69,301.25 509.69,337.25 563.69,337.25 1349.69,337.25 1391.69,337.25 51,992 87,992 51,1028 87,1028 1907.69,1411.25 1937.69,1411.25 1907.69,1441.25 1937.69,1441.25
Vref: C9.2 P2.20 R7.1 U1.32 | length 387.8
  Top Layer w6: v1(71.69,835.25) 160.98,835.25 cw(c160.98,808.24) C9.2@188,808.24 ; R7.1@188,749.18 C9.2@188,808.24 ; U1.32@353.69,894.25 315.41,894.25 ccw(c315.41,794.25) 244.7,864.96 C9.2@188,808.24
pads on no net: J1. J1.4 J1.MH1 J1.MH2 J2. J2.4 J2.MH1 J2.MH2 J3. J3.4 J3.MH1 J3.MH2 Y1.2 Y1.4

## Polygon pours and split planes (outlines as drawn)
GND on Gnd Layer "GND_L02_P002" (solid, remove dead copper, pour order 2): 0,1968 1968,1968 1968,0 0,0
VCC on Vcc Layer "VCC_L03_P010" (solid, remove dead copper, pour order 10): 0,1968 1968,1968 1968,0 0,0
GND on Bottom Layer "GND_L04_P012" (solid, remove dead copper, pour order 12): 0,1968 1968,1968 1968,0 0,0
GND on Top Layer "GND_L01_P014" (solid, remove dead copper, pour order 14): 0,1968 1968,1968 1968,0 0,0

## Keep-outs
Keep-Out Layer:
  the board outline again, w4

## Other copper
Top Layer:
  rectangle net VCC: 1181.69,151.25 1307.69,199.25
  rectangle net Vin: 1331.69,277.25 1421.69,355.25
  rectangle net Vin: 485.69,265.25 587.69,361.25
  rectangle net Vin: 1889.69,1387.25 1955.69,1459.25
Vcc Layer:
  rectangle net Vin: 1331.69,277.25 1421.69,355.25
  rectangle net Vin: 485.69,265.25 587.69,361.25
  rectangle net Vin: 1889.69,1387.25 1955.69,1459.25
  rectangle net Vin: 27,962 111,1052
Bottom Layer:
  rectangle net Vin: 27,962 111,1052
  rectangle net Vin: 1859.69,1321.25 1955.69,1459.25

## Silkscreen, mask and mechanical layers (free items; w line width, h text height)
Top Overlay:
  text "D" at 598.31,1678.42 h70
  text "Power" at 280,1555 h100 r90
  text "Usb" at 1467,1481 h100
  text "A" at 1496.31,1089.42 h200
  text "TTL" at 1588,447 h100
  text "Stlink" at 253,437 h100
  text "B" at 904.31,341.42 h100
Bottom Overlay:
  text "B" at 1423.31,1009.42 h400
  text "B8" at 743,384 h50
  text "B7" at 790,381 h50
  text "E4" at 642,380 h50
  text "E2" at 699,379 h50
  text "BT" at 789,323 h50
  text "E5" at 639,320 h50
  text "B9" at 742,318 h50
  text "E3" at 697,314 h50
Drill Drawing:
  lines w15: 2439.5,900.5 13020.57,900.5 ; 2439.5,1350.5 13020.57,1350.5 ; 2990.38,750.5 2990.38,1500.5 ; 3580.22,750.5 3580.22,1500.5 ; 4729.88,750.5 4729.88,1500.5 ; 5235.76,750.5 5235.76,1500.5 ; 5969.56,750.5 5969.56,1500.5 ; 7469.11,750.5 7469.11,1500.5 ; 8058.96,750.5 8058.96,1500.5 ; 8804.76,750.5 8804.76,1500.5 ; 9454.59,750.5 9454.59,1500.5 ; 10308.35,750.5 10308.35,1500.5 ; 11641.96,750.5 11641.96,1500.5 ; 2439.5,750.5 13020.57,750.5 13020.57,1500.5 2439.5,1500.5 2439.5,750.5
  text "Symbol" at 2529.5,1395.5 h72
  text "Count" at 3035.38,1395.5 h72
  text "Hole Size" at 3625.22,1395.5 h72
  text "Plated" at 4774.88,1395.5 h72
  text "Hole Type" at 5280.76,1395.5 h72
  text "Drill Layer Pair" at 6014.56,1395.5 h72
  text "Via/Pad" at 7514.11,1395.5 h72
  text "Pad Shape" at 8103.96,1395.5 h72
  text "Template" at 8849.76,1395.5 h72
  text "Description" at 9499.59,1395.5 h72
  text "Hole Tolerance (+)" at 10353.35,1395.5 h72
  text "Hole Tolerance (-)" at 11686.96,1395.5 h72
  text "1" at 3035.38,1245.5 h60
  text "125.98mil (3.200mm)" at 3625.22,1245.5 h60
  text "PTH" at 4774.88,1245.5 h60
  text "Round" at 5280.76,1245.5 h60
  text "Top Layer - Bottom Layer" at 6014.56,1245.5 h60
  text "Pad" at 7514.11,1245.5 h60
  text "Rounded" at 8103.96,1245.5 h60
  text "c8h320" at 8849.76,1245.5 h60
  text "C" at 2500.41,1235.51 h66.67
  text "6" at 3035.38,1095.5 h60
  text "50.00mil (1.270mm)" at 3625.22,1095.5 h60
  text "NPTH" at 4774.88,1095.5 h60
  text "Round" at 5280.76,1095.5 h60
  text "Top Layer - Bottom Layer" at 6014.56,1095.5 h60
  text "Pad" at 7514.11,1095.5 h60
  text "Rounded" at 8103.96,1095.5 h60
  text "c60hn127" at 8849.76,1095.5 h60
  text "B" at 2500.41,1085.51 h66.67
  text "464" at 3035.38,945.5 h60
  text "8.00mil (0.203mm)" at 3625.22,945.5 h60
  text "PTH" at 4774.88,945.5 h60
  text "Round" at 5280.76,945.5 h60
  text "Top Layer - Bottom Layer" at 6014.56,945.5 h60
  text "Via" at 7514.11,945.5 h60
  text "Rounded" at 8103.96,945.5 h60
  text "v41h20" at 8849.76,945.5 h60
  text "A" at 2500.41,935.51 h66.67
  text "471 Total" at 3035.38,795.5 h60